# Altium PCB ESC.PcbDoc
Units mil, origin at the board's own origin, x right, y up, seen from the top; angles counter-clockwise.
Board outline 1750 x 2730 mil, 2 copper layers (Top Layer, Bottom Layer); 82 components, 60 nets, 320 pads, 163 vias.
Unrouted connection lines stored in the file: 1.
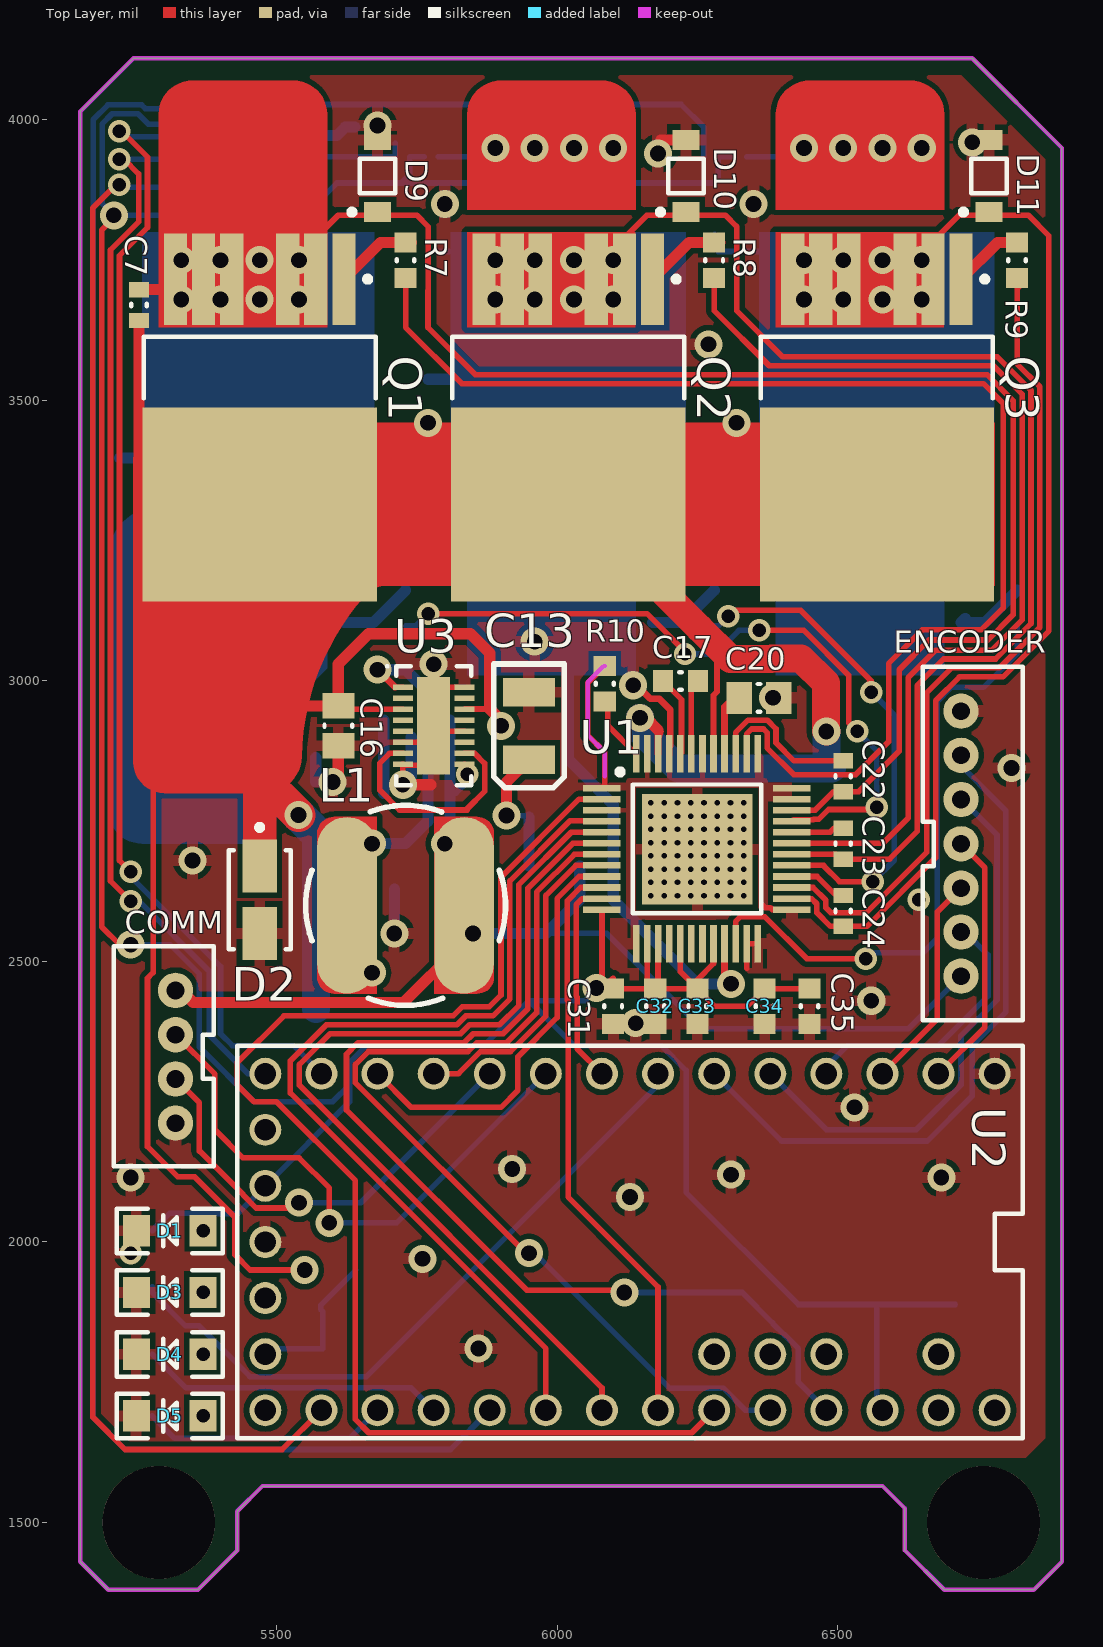
[diagram p0: Top Layer view]
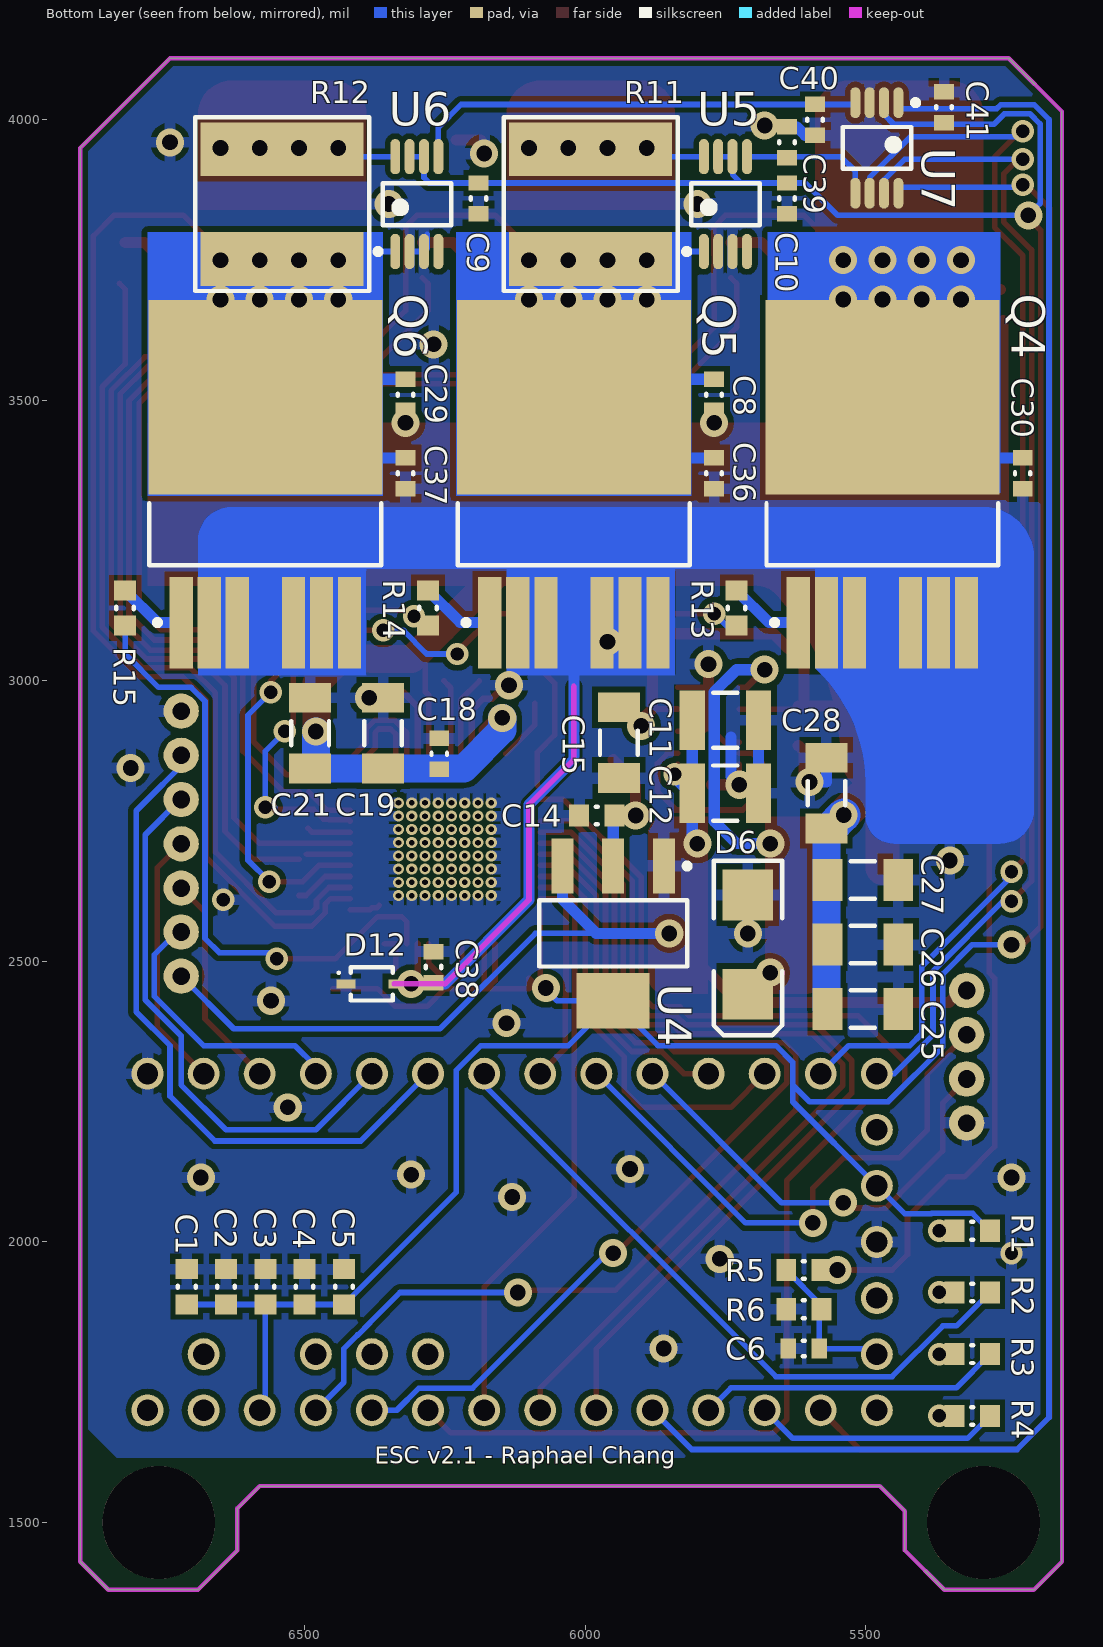
[diagram p1: Bottom Layer view, seen from below]

## Layer stack, top to bottom
Top Solder: solder mask 0.4, Solder Resist, Dk 3.5
Top Layer: signal copper 1.4
Dielectric 1: dielectric 12.6, FR-4, Dk 4.8
Bottom Layer: signal copper 1.4
Bottom Solder: solder mask 0.4, Solder Resist, Dk 3.5

## Board outline
5150,1430 5200,1380 5360,1380 5430,1450 5430,1520 5475,1565 6580,1565 6620,1525 6620,1450 6690,1380 6850,1380 6900,1430 6900,3950 6740,4110 5245,4110 5150,4015

## Design rules (kind name [scope] priority, off if disabled: settings)
Clearance Clearance_1 [InPolygon] p1: gap=9.84
Clearance [All] p2: gap=5.91
PolygonConnect [All] p1: connectstyle=Relief reliefconductorwidth=20 reliefentries=4 polygonreliefangle="90 Angle" airgapwidth=10
RoutingVias [All] p1: holewidth=28 width=50 viastyle="Through Hole" minholewidth=24 minwidth=40 maxholewidth=28 maxwidth=50
SolderMaskExpansion [All] p1: expansion=4
Width [All] p1: maxlimit=60 minlimit=10 preferedwidth=10
30 further rules are at their usual default settings.

## Classes and differential pairs
component class U_Power: C7 C8 C11 C12 C13 C14 C15 C16 C17 C18 C19 C20 C21 C22 C23 C24 C25 C26 C27 C28 C29 C30 C31 C32 C33 C34 C35 C36 C37 C38 D2 D6 D9 D10 D11 D12 L1 Q1 Q2 Q3 Q4 Q5 Q6 R7 R8 R9 R10 R11 R12 R13 R14 R15 U1 U3 U4
component class U_MCU: C1 C2 C3 C4 C5 C6 C9 C10 C39 C40 C41 D1 D3 D4 D5 R1 R2 R3 R4 R5 R6 U5 U6 U7
component class ESC: COMM ENCODER

## Components (designator, comment, footprint, x,y, rotation, side; value= is the part's Value field where it differs from the comment)
C1 "2.2uF" CAPC0603(1608)55_N 6710,1920 r270 bottom
C2 "2.2uF" CAPC0603(1608)55_N 6640,1920 r270 bottom
C3 "2.2uF" CAPC0603(1608)55_N 6570,1920 r270 bottom
C4 "2.2uF" CAPC0603(1608)55_N 6500,1920 r270 bottom
C5 "2.2uF" CAPC0603(1608)55_N 6430,1920 r270 bottom
C6 "0.1uF" CAPC0603(1608)100_L 5610,1810 r0 bottom
C7 "100nF" CAPC0603(1608)100_L 5255,3670 r270 top
C8 "100nF" CAPC0603(1608)100_L 5770,3510 r270 bottom
C9 "0.1uF" CAPC0603(1608)100_L 6190,3860 r90 bottom
C10 "0.1uF" CAPC0603(1608)100_L 5640,3860 r90 bottom
C11 "100uF" CAPC1210(3225)280_N 5750,2930 r0 bottom
C12 "100uF" CAPC1210(3225)280_N 5750,2800 r0 bottom
C13 "100uF" AVX-CAPC7343_V 5950,2920 r90 top
C14 "2.2uF" CAPC0603(1608)55_N 5979.21,2760 r0 bottom
C15 "10uF" CAPC1206(3216)190_M 5940,2890 r90 bottom
C16 "4.7uF" CAPC0805(2012)145_N 5610,2920 r270 top
C17 "470nF" CAPC0603(1608)100_N 6220,3000 r0 top
C18 "0.1uF" CAPC0603(1608)100_L 6260,2870 r270 bottom
C19 "10uF" CAPC1206(3216)190_M 6360,2907.01 r270 bottom
C20 "10uF" CAPC0805(2012)145_N 6360,2970 r0 top
C21 "10uF" CAPC1206(3216)190_M 6490,2907.01 r270 bottom
C22 "470nF" CAPC0603(1608)100_L 6510,2830 r270 top
C23 "470nF" CAPC0603(1608)100_L 6510,2710 r270 top
C24 "470nF" CAPC0603(1608)100_L 6510,2590 r270 top
C25 "10uF" CAPC1206(3216)190_M 5505,2415 r0 bottom
C26 "10uF" CAPC1206(3216)190_M 5505,2530 r0 bottom
C27 "10uF" CAPC1206(3216)190_M 5505,2645 r0 bottom
C28 "10uF" CAPC1206(3216)190_M 5570,2800 r270 bottom
C29 "100nF" CAPC0603(1608)100_L 6320,3510 r270 bottom
C30 "100nF" CAPC0603(1608)100_L 5220,3370 r90 bottom
C31 "2.2uF" CAPC0603(1608)55_N 6100,2420 r90 top
C32 "2.2uF" CAPC0603(1608)55_N 6175,2420 r90 top
C33 "2.2uF" CAPC0603(1608)55_N 6250,2420 r90 top
C34 "2.2uF" CAPC0603(1608)55_N 6370,2420 r90 top
C35 "2.2uF" CAPC0603(1608)55_N 6450,2420 r90 top
C36 "100nF" CAPC0603(1608)100_L 5770,3370 r90 bottom
C37 "100nF" CAPC0603(1608)100_L 6320,3370 r90 bottom
C38 "0.1uF" CAPC0603(1608)100_L 6270,2490 r90 bottom
C39 "0.1uF" CAPC0603(1608)100_L 5640,3960 r270 bottom
C40 "0.1uF" CAPC0603(1608)100_L 5590,4000 r90 bottom
C41 "2.2uF" CAPC0603(1608)100_L 5360,4022.87 r270 bottom
COMM "" JST-4-PTH-VERT 5320,2330 r90 top (schematic designator JP1)
D1 "LED-BLUE" LED-1206 5310,2020 r180 top
D2 "TVS 50V" VISH-DO-214AC-2_N 5470,2610 r270 top
D3 "LED-GREEN" LED-1206 5310,1910 r180 top
D4 "LED-RED" LED-1206 5310,1800 r180 top
D5 "LED-AMBER" LED-1206 5310,1690 r180 top
D6 "" SMB 5710,2530 r270 bottom
D9 "MMSZ5262BT1G" ONSC-SOD-123-2-425-04_V 5680,3900 r90 top
D10 "MMSZ5262BT1G" ONSC-SOD-123-2-425-04_V 6230,3900 r90 top
D11 "MMSZ5262BT1G" ONSC-SOD-123-2-425-04_V 6770,3900 r90 top
D12 "CDSOD323" SOD323 6380,2460 r180 bottom
ENCODER "Encoder Pins" JST-7-PTH-VERT 6720,2710 r270 top (schematic designator JP2)
L1 "SDR0805-180ML" SDR0805-180ML 5730,2600 r0 top
Q1 "IRFS7530" DPAK127P1525X483-7N 5470,3470 r270 top
Q2 "IRFS7530" DPAK127P1525X483-7N 6020,3470 r270 top
Q3 "IRFS7530" DPAK127P1525X483-7N 6570,3470 r270 top
Q4 "IRFS7530" DPAK127P1525X483-7N 5470,3350 r90 bottom
Q5 "IRFS7530" DPAK127P1525X483-7N 6020,3350 r90 bottom
Q6 "IRFS7530" DPAK127P1525X483-7N 6570,3350 r90 bottom
R1 "10R" RESC0603(1608)_N 5310,2020 r180 bottom
R2 "15R" RESC0603(1608)_N 5310,1910 r180 bottom
R3 "180R" RESC0603(1608)_N 5310,1800 r180 bottom
R4 "150R" RESC0603(1608)_N 5310,1690 r180 bottom
R5 "200K" RESC0603(1608)_N 5610,1950 r180 bottom
R6 "10K" RESC0603(1608)_N 5610,1880 r0 bottom
R7 "4R7" RESC0603(1608)_N 5730,3750 r270 top
R8 "4R7" RESC0603(1608)_N 6280,3750 r270 top
R9 "4R7" RESC0603(1608)_N 6820,3750 r270 top
R10 "3K3" RESC0603(1608)_N 6085,2995 r270 top
R11 "" Shunt 5990,3850 r270 bottom
R12 "" Shunt 6540,3850 r270 bottom
R13 "4R7" RESC0603(1608)_N 5730,3130 r270 bottom
R14 "4R7" RESC0603(1608)_N 6280,3130 r270 bottom
R15 "4R7" RESC0603(1608)_N 6820,3130 r270 bottom
U1 "A4935" LQFP-48 6250,2700 r0 top
U2 "Teensy 3.2" TEENSY_3.0+4 6130,2000 r270 top
U3 "LTC3637" SON50P300X85_HS-17N 5780,2920 r0 top
U4 "TC2117" SOT-223-DB3_M 5950,2550 r270 bottom
U5 "AD8418" MSOP-8 5750,3850 r90 bottom
U6 "AD8418" MSOP-8 6300,3850 r90 bottom
U7 "ADC122S101CIMM/NOPB" MUA08A_L 5480,3950 r270 bottom

## Footprints (in the part's own frame and the unit in brackets; to place one, negate y for a bottom-side part, rotate by r counter-clockwise, add the part's x,y. Pads: shape width x height; smd on the part's side, far side on the other; paste and mask are expansions set on the pad)
AVX-CAPC7343_V [mm] "SMT Capacitor, 2 Leads, Body 7.3x4.3mm"
  rect 1.3x2.35 smd: 1(-1.535,0.001) 2(1.515,0.001)
  silkscreen extent -2.8,-1.6 2.8,1.6, body extent -2.1,-1.1 2.1,1.1, height 1.9
CAPC0603(1608)55_N [mm] "Chip Capacitor, Body 1.6x0.8mm, Height 0.55mm, IPC Medium Density"
  rect 0.9x1 smd: 1(-0.8,0) 2(0.8,0)
  silkscreen extent -0.05,-0.4 0.05,0.4, body extent -0.87,-0.48 0.88,0.47, height 0.55
CAPC0603(1608)100_L [mm] "Chip Capacitor, Body 1.6x0.8mm, Height 1.0mm, IPC High Density"
  rect 0.7x0.9 smd: 1(-0.7,0) 2(0.7,0)
  silkscreen extent -0.05,-0.35 0.05,0.35, body extent -0.87,-0.47 0.88,0.48, height 1
CAPC0603(1608)100_N [mm] "Chip Capacitor, Body 1.6x0.8mm, Height 1.0mm, IPC Medium Density"
  rect 0.9x1 smd: 1(-0.8,0) 2(0.8,0)
  silkscreen extent -0.05,-0.4 0.05,0.4, body extent -0.87,-0.48 0.88,0.47, height 1
CAPC0805(2012)145_N [mm] "Chip Capacitor, Body 2.0x1.2mm, Height 1.45mm, IPC Medium Density"
  rect 1.15x1.45 smd: 1(-0.9,0) 2(0.9,0)
  silkscreen extent -0.05,-0.62 0.05,0.63, body extent -1.1,-0.72 1.1,0.73, height 1.45
CAPC1206(3216)190_M [mm] "Chip Capacitor, Body 3.2x1.6mm, Height 1.9mm, IPC Low Density"
  rect 1.35x1.9 smd: 1(-1.6,0) 2(1.6,0)
  silkscreen extent -0.55,-0.85 0.55,0.85, body extent -1.7,-0.9 1.7,0.9, height 1.9
CAPC1210(3225)280_N [mm] "Chip Capacitor, Body 3.2x2.5mm, Height 2.8mm, IPC Medium Density"
  rect 1.15x2.7 smd: 1(-1.5,0) 2(1.5,0)
  silkscreen extent -0.55,-1.25 0.55,1.25, body extent -1.7,-1.4 1.7,1.4, height 2.8
DPAK127P1525X483-7N [mm] "D2-PAK, 7-Pads, Body 7.93x8.63mm (max), IPC Medium Density"
  rect 4.15x1.05 smd mask+0.051: 1(-6.25,3.81) 2(-6.25,2.54) 2(-6.25,-1.27) 2(-6.25,1.27) 2(-6.25,-3.81) 2(-6.25,-2.54)
  rect 8.8x10.6 smd: 8(3.95,0)
  silkscreen extent -6.37,-5.25 -0.85,5.25, body extent -7,-5 8,5, height 4.2
JST-4-PTH-VERT [mil]
  round 63 hole 31.5: 1(-118.11,0) 2(-39.37,0) 3(39.37,0) 4(118.37,0)
  silkscreen extent -195,-68 197,110, body extent -195,-67 195,110, height 236
JST-7-PTH-VERT [mil]
  round 63 hole 31.5: 1(-236.22,0) 2(-157.48,0) 3(-78.74,0) 4(0.26,0) 5(79.26,0) 6(157.48,0) 7(236.22,0)
  silkscreen extent -315,-68 315,110, body extent -317,-67 309,110, height 236
LED-1206 [mil]
  rect 48x56 smd: A(-59.06,0) C(60,0)
  silkscreen extent -94,-39 95,40, body extent -63,-31 63,31, height 43
LQFP-48 [mm]
  rect 1.7x0.3 smd mask+0.076: 1(-4.318,2.767) 2(-4.318,2.267) 3(-4.318,1.767) 4(-4.318,1.267) 5(-4.318,0.767) 6(-4.318,0.267) 7(-4.318,-0.233) 8(-4.318,-0.733) 9(-4.318,-1.233) 10(-4.318,-1.733) 11(-4.318,-2.233) 12(-4.318,-2.733) 25(4.282,-2.733) 26(4.282,-2.233) 27(4.282,-1.733) 28(4.282,-1.233) 29(4.282,-0.733) 30(4.282,-0.233) 31(4.282,0.267) 32(4.282,0.767) 33(4.282,1.267) 34(4.282,1.767) 35(4.282,2.267) 36(4.282,2.767)
  rect 0.3x1.7 smd mask+0.076: 13(-2.768,-4.283) 14(-2.268,-4.283) 15(-1.768,-4.283) 16(-1.268,-4.283) 17(-0.768,-4.283) 18(-0.268,-4.283) 19(0.232,-4.283) 20(0.732,-4.283) 21(1.232,-4.283) 22(1.732,-4.283) 23(2.232,-4.283) 24(2.732,-4.283) 37(2.732,4.317) 38(2.232,4.317) 39(1.732,4.317) 40(1.232,4.317) 41(0.732,4.317) 42(0.232,4.317) 43(-0.268,4.317) 44(-0.768,4.317) 45(-1.268,4.317) 46(-1.768,4.317) 47(-2.268,4.317) 48(-2.768,4.317)
  rect 5x5 smd: 49(0,0)
  silkscreen extent -3.63,-2.9 2.9,3.63, body extent -4.5,-4.5 4.5,4.5, height 1.5
MSOP-8 [mm] "SOP, 8-Leads, Body 3x3mm, Pitch 0.65mm, IPC Medium Density"
  oval 1.6x0.45 smd: 1(-2.15,0.975) 2(-2.15,0.325) 3(-2.15,-0.325) 4(-2.15,-0.975) 5(2.15,-0.975) 6(2.15,-0.325) 7(2.15,0.325) 8(2.15,0.975)
  silkscreen extent -2.27,-1.55 0.95,1.88, body extent -1.55,-1.55 1.55,1.55, height 0.05
MUA08A_L [mm] "TSOP, 8-Leads, Body 3x3mm, Pitch 0.65mm, IPC High Density"
  oval 1.4x0.45 smd: 1(-2.05,0.975) 2(-2.05,0.325) 3(-2.05,-0.325) 4(-2.05,-0.975) 5(2.05,-0.975) 6(2.05,-0.325) 7(2.05,0.325) 8(2.05,0.975)
  silkscreen extent -2.17,-1.55 0.95,1.87, body extent -1.55,-1.55 1.55,1.55, height 1.09
ONSC-SOD-123-2-425-04_V [mm] "SOD, 2-Leads, Body 2.69x1.6mm"
  rect 0.91x1.22 smd: 1(-1.635,0) 2(1.635,0)
  silkscreen extent -1.76,-0.8 0.78,1.28, body extent -1.35,-0.8 1.35,0.8, height 1.35
RESC0603(1608)_N [mm] "Chip Resistor, Body 1.6x0.8mm, IPC Medium Density"
  rect 0.9x1 smd: 1(-0.8,0) 2(0.8,0)
  silkscreen extent -0.05,-0.4 0.05,0.4, body extent -0.85,-0.47 0.85,0.47, height 0.6
SDR0805-180ML [mm]
  rrect100% 2.7x8 smd: 1(-2.65,0) 2(2.65,0)
  Top Layer region: 3.25,4 1.3,4 1.3,-4 3.25,-4 3.537,-3.943 3.78,-3.78 3.943,-3.537 4,-3.25 4,-3.25 4,3.25 3.943,3.537 3.78,3.78 3.537,3.943 3.25,4
  Top Layer region: -3.25,4 -1.3,4 -1.3,-4 -3.25,-4 -3.537,-3.943 -3.78,-3.78 -3.943,-3.537 -4,-3.25 -4,-3.25 -4,3.25 -3.943,3.537 -3.78,3.78 -3.537,3.943 -3.25,4
  silkscreen extent -4.52,-4.53 4.52,4.52, body extent -3.9,-3.9 3.9,3.9, height 5.3
Shunt [mm]
  rect 2.44x7.38 smd: 1(-2.48,0) 2(2.48,0)
  silkscreen extent -3.94,-3.94 3.94,3.94
SMB [mm] "DO-214-AA/SMB; 2 C-Bend Leads; Body 5.3 x 3.6 mm, inc. leads (LxW)"
  rect 2.3x2.3 smd: 1(-2.25,0) 2(2.25,0)
  silkscreen extent -3.8,-1.55 4.1,1.55
SOD323 [mm] "SODFL, 2-Leads, Body 1.30x2.57mm, IPC Medium Density"
  rect 0.85x0.4 smd: 1(-1.175,0) 2(1.175,0)
  silkscreen extent -1.55,-0.75 0.95,0.75, body extent -0.95,-0.72 0.95,0.72, height 1.14
SON50P300X85_HS-17N [mm] "SON, 16-Leads, Body 5.00x3.00mm, Pitch 0.50mm, Thermal Pad 4.40x1.49mm, IPC Medium Density"
  rect 0.9x0.25 smd mask+0.076: 1(-1.395,1.75) 2(-1.395,1.25) 3(-1.395,0.75) 4(-1.395,0.25) 5(-1.395,-0.25) 6(-1.395,-0.75) 7(-1.395,-1.25) 8(-1.395,-1.75) 9(1.395,-1.75) 10(1.395,-1.25) 11(1.395,-0.75) 12(1.395,-0.25) 13(1.395,0.25) 14(1.395,0.75) 15(1.395,1.25) 16(1.395,1.75)
  rect 1.49x4.4 smd mask+0.076: 17(0,0)
  silkscreen extent -2.15,-2.7 1.7,2.75, body extent -1.56,-2.05 1.56,2.05, height 0.8
SOT-223-DB3_M [mm] "SOT223, 4-Leads, Body 6.5x3.5mm, Pitch 2.3mm, Lead Span 7mm, IPC Low Density"
  rect 2.5x1 smd: 1(-3.05,2.3) 2(-3.05,0) 3(-3.05,-2.3)
  rect 2.5x3.3 smd: 2(3.05,0)
  silkscreen extent -3.17,-3.35 1.5,3.47, body extent -1.85,-3.35 1.85,3.35, height 1.8
TEENSY_3.0+4 [mil]
  round 57 hole 38: 0(-300,550) 1(-300,450) 2(-300,350) 3(-300,250) 3.3V(300,450) 3.3V1(-100,-650) 4(-300,150) 5(-300,50) 6(-300,-50) 7(-300,-150) 8(-300,-250) 9(-300,-350) 10(-300,-450) 11(-300,-550) 12(-300,-650) 13(300,-650) 14/A0(300,-550) 15/A1(300,-450) 16/A2(300,-350) 17/A3(300,-250) 18/A4(300,-150) 19/A5(300,-50) 20/A6(300,50) 21/A7(300,150) 22/A8(300,250) 23/A9(300,350) A10(200,250) A11(200,150) A14(200,-650) AGND(300,550) AREF(200,350) GND(-300,650) GND1(0,-650) PGM(100,-650) VBAT(-200,-650) VIN(300,650) VUSB(200,550)
  silkscreen extent -350,-700 350,700, body extent -348,-708 349,720, height 505
VISH-DO-214AC-2_N [mm] "DO-214AC, 2-Leads, Body 4.5x2.79mm, IPC Medium Density"
  rect 2.4x1.55 smd: 1(-1.525,0) 2(1.525,0)
  silkscreen extent -3.4,-1.4 2.25,1.4, body extent -2.25,-1.4 2.25,1.39, height 2.29

## Part data
C1 C2 C3 C4 C5 C14 C31 C32 C33 C34 C35: library part CMP-1035-02762-1, "CAP 2.2uF 16V ±10% 0603 (1608 Metric) Thickness 0.55mm SMD"
C6 C7 C8 C18 C29 C30 C36 C37: library part CMP-1035-02591-1, "CAP 100nF 50V ±5% 0603 (1608 Metric) Thickness 1mm SMD"
C9 C10: library part CMP-1035-02577-1, "CAP 100nF 6.3V ±20% 0603 (1608 Metric) Thickness 1mm SMD"
C11 C12: library part CMP-1038-02301-1, "CAP 100uF 10V ±10% 1210 (3225 Metric) Thickness 2.8mm SMD"
C13: library part AVX-CAP-P-2
C15 C19 C21 C25 C26 C27 C28: library part CMP-1037-04982-1, "CAP 10uF 50V ±10% 1206 (3216 Metric) Thickness 1.9mm SMD"
C16: library part CMP-1036-04900-1, "CAP 4.7uF 50V ±10% 0805 (2012 Metric) Thickness 1.45mm SMD"
C17: library part CMP-1035-02704-1, "CAP 470nF 25V ±20% 0603 (1608 Metric) Thickness 1mm SMD"
C20: library part CMP-1036-04932-1, "CAP 10uF 25V ±10% 0805 (2012 Metric) Thickness 1.45mm SMD"
C22 C23 C24: library part CMP-1035-02703-1, "CAP 470nF 25V ±10% 0603 (1608 Metric) Thickness 1mm SMD"
C38 C39 C40: library part CMP-1035-02575-1, "CAP 100nF 6.3V ±5% 0603 (1608 Metric) Thickness 1mm SMD"
C41: library part CMP-1035-02754-1, "CAP 2.2uF 6.3V ±10% 0603 (1608 Metric) Thickness 1mm SMD"
COMM: library part JST_4_VERT
D1: library part LED-BLUE1206
D2: library part CMP-0548-00253-1, "Transient Voltage Suppressor, 6.40 to 231 V, 45 V Stand-off Voltage, Uni-Directional, -55 to 155 degC, 2-pin DO-214AC, Pb-Free, Tape and Reel"
D3: library part LED-GREEN1206
D4: library part LED-RED1206
D5: library part LED-AMBER1206
D6: library part "D Schottky", "Schottky Diode"
D9 D10 D11: library part CMP-1060-00504-1, "Zener Voltage Regulator, 500 mW, 2-Pin SOD-123, Pb-Free, Tape and Reel"
D12: "Zener Voltage Regulator, 500 mW, 2-Pin SOD-123, Pb-Free, Tape and Reel"
ENCODER: library part JST_7_VERT
L1: "Inductor"
Q1 Q2 Q3 Q4 Q5 Q6: "N-Channel MOSFET"
R1: library part CMP-1012-00026-1, "10R 0.1W 5% 0603 (1608 Metric)  SMD"
R2: library part CMP-1012-00030-1, "15R 0.1W 5% 0603 (1608 Metric)  SMD"
R3: library part CMP-1012-00056-1, "180R 0.1W 5% 0603 (1608 Metric)  SMD"
R4: library part CMP-1012-00054-1, "150R 0.1W 5% 0603 (1608 Metric)  SMD"
R5: library part CMP-1012-00129-1, "200K 0.1W 5% 0603 (1608 Metric)  SMD"
R6: library part CMP-1012-00098-1, "10K 0.1W 5% 0603 (1608 Metric)  SMD"
R7 R8 R9 R13 R14 R15: library part CMP-1012-00018-1, "4R7 0.1W 5% 0603 (1608 Metric)  SMD"
R10: library part CMP-1012-00086-1, "3K3 0.1W 5% 0603 (1608 Metric)  SMD"
R11: library part Shunt, "0.001R"
R12: library part Shunt, "Resistor"
U2: library part TEENSY_3.0+4
U4: library part PM-LINEREG-TC2117-IL4
U7: library part CMP-0054-00398-2, "2 Channel, 500 kSPS to 1 MSPS 12-Bit A/D Converter, 8-pin Mini SOIC, Pb-Free"

## Free pads (board coordinates)
  round 201 hole 201: 0(5290,1500) 1(6760,1500)

## Via types
v1: diameter 50, hole 28, Top Layer to Bottom Layer, 78 vias
v2: diameter 20, hole 10, Top Layer to Bottom Layer, 64 vias
v3: diameter 40, hole 24, Top Layer to Bottom Layer, 21 vias

## Nets (pads, with @x,y where several pads share a name; then routed paths per layer and width w, separated by ;. In a path a pad name is that pad's centre, name@x,y a point inside that pad or via, vN(x,y) a via of type N, cw(c..) or ccw(c..) an arc to the next point about the centre after c; other vN are vias at no path point)
5V: C11.2 C12.2 COMM.4 ENCODER.7 L1.2 U3.9 U4.3 | length 2059.2
  Top Layer w10: L1.2@5824.33,2524.33 L1.2@5824.33,2600 ; U3.9 5846.02,2840 v3(5840,2833.98)
  Top Layer w20: COMM.4@5320,2458.37 5351.56,2426.81 5507.1,2426.81 5507.3,2426.61 5726.61,2426.61 L1.2@5824.33,2524.33
  Bottom Layer w10: v1(5800,2710) v1@5809.06,2719.06 ; C12.2 5820,2800 5840,2820 v3(5840,2833.98) ; 5980,2550 6088.6,2550 6258.6,2380 6626.22,2380 ENCODER.7
  Bottom Layer w20: v1@5809.06,2719.06 C12.2 C11.2 ; v1(5850,2550) 5980,2550 6040.55,2610.55 U4.3
ADC_CS: U2.17/A3 U7.1 | length 3353.7
  Bottom Layer w10: U7.1@5440,4020 5266.2,4020 5259.39,4026.81 5199.32,4026.81 5173.19,4000.68 5173.19,1686.81 5230,1630 5810,1630 U2.17/A3
C1: C39.2 U5.5 U7.5 | length 266.9
  Bottom Layer w10: U7.5 5518.39,3908.39 5544.65,3934.65 U5.5 U5.5@5711.61,3958.39
C2: C40.2 U6.5 U7.4 | length 812.4
  Bottom Layer w10: U7.4@5518.39,4027.56 6221.04,4027.56 6261.61,3986.98 U6.5
CA: C22.1 U1.39 | length 283.8
  Top Layer w10: U1.39 6318.19,2908.19 6340.24,2930.24 6374.57,2930.24 6390.28,2914.53 6390.28,2889.72 6422.44,2857.56 C22.1
CB: C23.1 U1.32 | length 78.6
  Top Layer w10: U1.32 6486.73,2730.2 C23.1@6494.09,2737.56
CC: C24.1 U1.28 | length 105.4
  Top Layer w10: U1.28 6463.54,2651.46 6497.47,2617.53 C24.1@6509.97,2617.53
CLK: ENCODER.5 U2.1 | length 388.7
  Top Layer w10: U2.1 6677.59,2397.59 6677.59,2588.33 ENCODER.5
CS: ENCODER.6 U2.2 | length 491.4
  Bottom Layer w10: U2.2 6480,2312.52 6517.48,2350 6680,2350 6768.19,2438.19 6768.19,2511.81 6727.48,2552.52 ENCODER.6
DIO: ENCODER.4 U2.0 | length 461.4
  Top Layer w10: U2.0 6762.41,2382.41 6762.41,2667.33 ENCODER.4
GHA: R7.2 U1.38 | length 2329.2
  Top Layer w10: R7.2@5740,3718.5 5730,3708.5 5730,3630 5830,3530 6760,3530 6795,3495 6795,3130 6755.91,3090.91 6650.91,3090.91 6590.91,3030.91 6590.91,2891.55 6532.23,2832.87 6422.2,2832.87 6374.37,2880.71 6374.37,2907.94 6367.98,2914.33 6346.82,2914.33 6337.87,2905.38 U1.38
GHB: R8.2 U1.31 | length 1797.2
  Top Layer w10: R8.2@6290,3718.5 6280,3708.5 6280,3660 6378.19,3561.81 6778.19,3561.81 6828.88,3511.12 6828.88,3108.88 6775,3055 6675,3055 6625.91,3005.91 6625.91,2755.91 6580.51,2710.51 U1.31
GHC: R9.2 U1.27 | length 1479.4
  Top Layer w10: U1.27 6456.5,2631.77 6478.86,2609.41 6478.86,2596.03 6487.77,2587.13 6551.34,2587.13 6659.09,2694.88 6659.09,2979.09 6703.19,3023.19 6788.18,3023.19 6860.69,3095.71 6860.69,3524.31 6820,3565 6820,3698.5 R9.2@6830,3708.5
GLA: R13.2 U1.33 | length 1322.8
  Top Layer w10: v3(5770,3120) 6160,3120 6228.01,3051.99 v3(6228.01,3048.01) ; v3(6360,3090) 6440,3090 6520,3010 6520,2925 v3(6535,2910) ; U1.33 6421.46,2752.76 6456.56,2752.76 6457.47,2753.66 6466.67,2753.66 6483.91,2770.91 6565.91,2770.91 v3(6570,2775)
  Bottom Layer w10: R13.2 5748.5,3098.5 v3(5770,3120) ; v3(6228.01,3048.01) 6282.33,3048.01 6284.32,3050 6322.16,3087.84 6321.85,3088.15 6323.71,3090 v3(6360,3090) ; v3(6535,2910) 6570,2875 6570,2791.29 6553.71,2775 v3(6570,2775)
GLB: R14.2 U1.29 | length 898.8
  Top Layer w10: v3(6305,3115) 6315.91,3125.91 6434.09,3125.91 6560,3000 6550,2990 v3(6560,2980) ; U1.29 6475,2671.14 6475,2670.52 6503.28,2642.24 v3(6562.76,2642.24)
  Bottom Layer w10: R14.2 6288.5,3098.5 v3(6305,3115) ; v3(6560,2980) 6600.91,2939.09 6600.91,2680.39 v3(6562.76,2642.24)
GLC: R15.2 U1.22 | length 1104
  Top Layer w10: U1.22 6318.19,2571.06 6327.13,2580 6370,2580 6445,2505 v3(6550,2505) v3@6550,2499.99
  Bottom Layer w10: v3(6550,2505) 6560.51,2515.51 6651.92,2515.51 6677.59,2541.19 6677.59,2963.79 6702.44,2988.63 6760.12,2988.63 6820,3048.5 R15.2
GND: C1.1 C2.1 C3.1 C4.1 C5.1 C6.2 C9.1 C10.1 C11.1 C12.1 C13.2 C14.2 C15.1 C16.2 C18.1 C19.1 C20.2 C21.1 C25.1 C26.1 C27.1 C28.1 C30.1 C31.1 C32.1 C33.1 C34.1 C35.1 C36.1 C37.1 C38.1 C38.2 C39.1 C40.1 C41.1 COMM.1 D1.C D2.2 D3.C D4.C D5.C D6.1 D9.2 D10.2 D11.2 D12.1 D12.2 ENCODER.1 Q4.2 Q5.2 Q6.2 R6.2 R10.1 U1.1 U1.3 U1.13 U1.21 U1.23 U1.24 U1.25 U1.35 U1.36 U1.37 U1.42 U1.45 U1.47 U1.49 U2.GND U2.GND1 U3.6 U3.8 U3.12 U3.16 U3.17 U4.1 U5.2 U5.3 U6.2 U6.3 U7.3 | length 2446.5
  Top Layer w10: v1(5725.08,2814.92) U3.8 5726.18,2850 5750,2850 ; U3.6 5750.47,2890.47 U3.17 5789.84,2910.16 U3.12 ; U3.17@5780,2990 5781.1,2988.9 U3.16 ; U1.1 6085,2813.94 6085,2872.9 6054.41,2903.49 6054.41,2995.91 R10.1 ; v1(6135.59,2992.28) v1@6141.99,2992.28 ; v1@6298.5,2471.5 v1(6310,2460) ; 6337.87,2487.91 U1.23 U1.24 ; 6366.85,2599.88 6370.83,2595.91 6379.97,2595.91 6383.47,2592.4 U1.25
  Top Layer w12: v1@6141.99,2992.28 6165.86,2968.41 6181.59,2968.41 6201.91,2948.09 6201.91,2885.07 6200.08,2883.24 U1.45 ; v1@6298.5,2471.5 U1.21
  Top Layer w20: v1(5600,2820) 5610,2830 5610,2874.57 C16.2@5620,2884.57 ; v1(5725.08,2814.92) 5774.92,2814.92 ; U3.17 5780,2990 v1(5780,3030) ; 6185.63,3964.37 D10.2
  Bottom Layer w10: 6281.38,3796.18 6281.38,3771.18 U6.3 U6.2
  Bottom Layer w20: C28.1 5570,2820 v1(5600,2820) ; C40.1 5607.44,3972.44 5622.56,3987.56 C39.1 ; v1@5672.44,3997.56 v1(5680,3990) ; C12.1 C11.1 ; v1(5710,2550) D6.1@5710,2628.58 ; v1(5725.08,2814.92) 5730,2810 5730,2820 5740,2830 5740,2900 ; 6020,3120 6020,2860 6100,2780 6100,2610 6250,2460 v1(6310,2460)
  other v1: 5860,1810 5760,1970 6130,2080 5240,2115 6685,2115 6310,2120 5920,2130 6530,2240 6140,2390 6560,2430 5350,2680 6810,2845 6385,2970 5960,3070 6270,3600 5800,3850 6350,3850 6180,3940 6740,3960
  other v2: 6167.32,2617.32 6190.94,2617.32 6214.57,2617.32 6238.19,2617.32 6261.81,2617.32 6285.43,2617.32 6309.06,2617.32 6332.68,2617.32 6167.32,2640.94 6190.94,2640.94 6214.57,2640.94 6238.19,2640.94 6261.81,2640.94 6285.43,2640.94 6309.06,2640.94 6332.68,2640.94 6167.32,2664.57 6190.94,2664.57 6214.57,2664.57 6238.19,2664.57 6261.81,2664.57 6285.43,2664.57 6309.06,2664.57 6332.68,2664.57 6167.32,2688.19 6190.94,2688.19 6214.57,2688.19 6238.19,2688.19 6261.81,2688.19 6285.43,2688.19 6309.06,2688.19 6332.68,2688.19 6167.32,2711.81 6190.94,2711.81 6214.57,2711.81 6238.19,2711.81 6261.81,2711.81 6285.43,2711.81 6309.06,2711.81 6332.68,2711.81 6167.32,2735.43 6190.94,2735.43 6214.57,2735.43 6238.19,2735.43 6261.81,2735.43 6285.43,2735.43 6309.06,2735.43 6332.68,2735.43 6167.32,2759.06 6190.94,2759.06 6214.57,2759.06 6238.19,2759.06 6261.81,2759.06 6285.43,2759.06 6309.06,2759.06 6332.68,2759.06 6167.32,2782.68 6190.94,2782.68 6214.57,2782.68 6238.19,2782.68 6261.81,2782.68 6285.43,2782.68 6309.06,2782.68 6332.68,2782.68
  other v3: 5240,1980 6645,2610
NetC6_1: C6.1 R5.1 R6.1 U2.A14 | length 274.3
  Bottom Layer w10: U2.A14 5490,1810 C6.1 5582.44,1876.06 R6.1 5578.5,1887.01 R5.1
NetC17_1: C17.1 U1.44 | length 144.6
  Top Layer w10: C17.1 6221.69,2966.81 6221.69,2871.89 U1.44
NetC17_2: C17.2 U1.43 | length 135
  Top Layer w10: U1.43 6239.45,2987.95 C17.2
NetC20_1: C20.1 U1.40 | length 120.8
  Top Layer w12: U1.40 6298.5,2953.94 C20.1@6324.57,2980
NetD1_A: D1.A R1.1
  other v3: 5369.06,2020
NetD3_A: D3.A R2.1
  other v3: 5369.06,1910
NetD4_A: D4.A R3.1
  other v3: 5369.06,1800
NetD5_A: D5.A R4.1
  other v3: 5369.06,1690
NetD6_2: D6.2 L1.1 U3.1 | length 511.1
  Top Layer w10: U3.1@5711.1,2988.9 U3.1
  Top Layer w12: v1(5680,3020) U3.1@5711.1,2988.9
  Bottom Layer w20: v1(5670,2710) 5730,2710 5770,2750 5770,2980 5730,3020 v1(5680,3020)
  other v1: 5670,2480
NetQ1_2: Q1.1 R7.1 | length 147.1
  Top Layer w20: Q1.1 5685.43,3781.5 R7.1@5740,3781.5
NetQ2_2: Q2.1 R8.1 | length 147.1
  Top Layer w20: Q2.1 6235.43,3781.5 R8.1@6290,3781.5
NetQ3_2: Q3.1 R9.1 | length 127.1
  Top Layer w20: Q3.1 6785.43,3781.5 R9.1
NetQ4_2: Q4.1 R13.1 | length 133.8
  Bottom Layer w20: Q4.1 5672.44,3103.94 R13.1
NetQ5_2: Q5.1 R14.1 | length 133.8
  Bottom Layer w20: Q5.1 6222.44,3103.94 R14.1
NetQ6_2: Q6.1 R15.1 | length 134.5
  Bottom Layer w20: Q6.1@6727.56,3111.5 Q6.1 6762.44,3103.94 R15.1
NetR2_2: R2.2 U2.5 | length 1209.2
  Bottom Layer w10: R2.2@5278.5,1920.17 R2.2 5338.03,1850.47 5362.29,1850.47 5452.76,1760 5660,1760 6180,2280 U2.5
NetR3_2: R3.2 U2.16/A2 | length 542.9
  Bottom Layer w10: R3.2 5338.5,1740 5740,1740 U2.16/A2
NetR4_2: R4.2 U2.15/A1 | length 438.8
  Bottom Layer w10: R4.2 5318.5,1650 5630,1650 U2.15/A1
NetR10_2: R10.2 U1.48 | length 111.2
  Top Layer w10: R10.2@6090,2960 6090,2920.98 U1.48
NetR11_1: R11.1 U5.8 | length 108
  Bottom Layer w10: U5.8 5874.65,3934.65 v1(5890,3950)
  other v1: 5960,3950 6030,3950 6100,3950
NetR12_1: R12.1 U6.8 | length 108
  Bottom Layer w10: U6.8 6424.65,3934.65 v1(6440,3950)
  other v1: 6510,3950 6580,3950 6650,3950
NetU1_2: U1.2 U2.21/A7 | length 2380.2
  Top Layer w10: U1.2 6039.25,2789.25 5900,2650 5900,2440 5878.93,2418.93 5830.74,2418.93 5814.83,2403.03 5513.03,2403.03 5430,2320 5430,2280 5460,2250 5500,2250 5640.59,2109.41 5640.59,1683.68 5664.27,1660 6240,1660 U2.21/A7
NetU1_4: U1.4 U2.18/A4 | length 1669.6
  Top Layer w10: U2.18/A4 5980,1810 5524.69,2265.31 5524.69,2322.91 5588.9,2387.12 5821.42,2387.12 5837.32,2403.03 5885.52,2403.03 5915.91,2433.41 5915.91,2643.41 6023.4,2750.91 6077.13,2750.91 6076.1,2749.88 U1.4
NetU1_5: U1.5 U2.19/A5 | length 1676.6
  Top Layer w10: U2.19/A5 6080,1740 5540.59,2279.41 5540.59,2316.32 5595.49,2371.22 5828.01,2371.22 5843.91,2387.12 5897.15,2387.12 5931.81,2421.79 5931.81,2636.82 6025.18,2730.2 U1.5
NetU1_6: U1.6 U2.23/A9 | length 1949
  Top Layer w10: U1.6 6027.99,2710.51 5947.72,2630.24 5947.72,2415.2 5903.74,2371.22 5850.5,2371.22 5834.6,2355.31 5645.31,2355.31 5624.69,2334.69 5624.69,2235.31 5945.91,1914.09 6115.91,1914.09 v1(6120,1910)
  Bottom Layer w10: v1(6120,1910) 6330,1910 6384.09,1855.91 6384.09,1855.13 6405.13,1834.09 6405.91,1834.09 6430,1810 6430,1750 U2.23/A9
NetU1_7: U1.7 U2.22/A8 | length 1774.6
  Top Layer w10: v1(5950,1980) 5944.27,1980 5640.59,2283.68 5640.59,2316.32 5663.68,2339.41 5841.18,2339.41 5857.09,2355.31 5910.32,2355.31 5963.62,2408.61 5963.62,2623.65 6030.8,2690.83 U1.7
  Bottom Layer w10: v1(5950,1980) 5950,1968.19 5938.19,1980 5960,1980 6200.59,1739.41 6296.32,1739.41 6335.73,1700 U2.22/A8
NetU1_8: U1.8 U2.9 | length 579.7
  Top Layer w10: U2.9 5824.27,2300 5863.68,2339.41 5916.91,2339.41 5980,2402.49 5980,2617.53 6033.61,2671.14 U1.8
NetU1_9: U1.9 U2.10 | length 754.7
  Top Layer w10: U2.10 5740,2240 5900,2240 5930,2270 5930,2330 6000,2400 6000,2612.18 6039.27,2651.46 U1.9
NetU1_10: U1.10 U2.20/A6 | length 1046.6
  Top Layer w10: U1.10 6042.08,2631.77 6018.19,2607.88 6018.19,2431.04 6019.72,2429.5 6019.72,2080.28 6180,1920 U2.20/A6
NetU1_11: U1.11 U2.6 | length 370.7
  Top Layer w10: U2.6 6035.63,2344.37 6035.63,2436.09 6034.09,2437.63 6034.09,2601.29 6044.89,2612.09 U1.11
NetU3_7: U3.7 U3.10 | length 406.3
  Top Layer w10: U3.7 5701.3,2870.79 5684.09,2853.58 5684.09,2805.13 5719.22,2770 5840,2770 5840,2772.17 5870.91,2803.07 5870.91,2853.18 5853.3,2870.79 U3.10
QUAD_A: ENCODER.3 U2.3 | length 978.9
  Bottom Layer w10: U2.3 6480,2200 6640,2200 6720,2280 6720,2367.51 6784.09,2431.6 6784.09,2725.91 6720,2790 ENCODER.3
QUAD_B: ENCODER.2 U2.4 | length 1231.3
  Bottom Layer w10: U2.4 6400,2180 6660,2180 6740,2260 6740,2350 6800,2410 6800,2768.71 6703.71,2865 6720,2865 ENCODER.2
SA: C7.1 C22.2 C30.2 D9.1 Q1.2 Q4.8 U1.34 | length 2969.7
  Top Layer w10: Q1.2@5520,3716.06 5520,3740 5610,3830 5750,3830 5770.59,3809.41 5770.59,3759.26 5770,3758.67 5770,3741.33 5770.59,3740.74 5770.59,3696.27 5770,3695.68 5770,3630 5854.09,3545.91 6766.59,3545.91 6812.98,3499.52 6812.98,3117.98 6767.93,3072.93 6662.93,3072.93 6610,3020 6610,2875 6537.44,2802.44 C22.2 ; U1.34 6460.08,2769.57 C22.2@6492.95,2802.44
  Top Layer w20: C7.1@5260,3697.56 5301.5,3697.56 Q1.2@5320,3716.06
  Bottom Layer w10: v1(5540,3750) v1@5555.35,3765.35
  Bottom Layer w20: C30.2 5362.05,3397.56 Q4.8
  other v1: 5330,3680 5400,3680 5470,3680 5540,3680 5330,3750 5400,3750 5470,3750
SB: C8.1 C23.2 C36.2 D10.1 Q2.2 Q5.8 R11.2 U1.30 U5.1 | length 2873.7
  Top Layer w10: Q2.2@6070,3716.06 6095,3741.06 6095,3765 6160,3830 6300,3830 6320,3810 6320,3660 6402.28,3577.72 6784.78,3577.72 6844.79,3517.71 6844.79,3102.29 6781.59,3039.09 6689.09,3039.09 6641.81,2991.81 6641.81,2731.81 6592.44,2682.44 C23.2 ; U1.30 C23.2@6496.68,2690.83
  Bottom Layer w10: U5.1 5874.65,3765.35 v1(5890,3750)
  Bottom Layer w20: C36.2 5912.05,3397.56 Q5.8 5987.95,3537.56 C8.1
  other v1: 5890,3680 5960,3680 6030,3680 6100,3680 5960,3750 6030,3750 6100,3750
SC: C24.2 C29.1 C37.2 D11.1 Q3.2 Q6.8 R12.2 U1.26 U6.1 | length 2505.1
  Top Layer w10: U1.26 6453.69,2612.09 6462.95,2602.82 6462.95,2587.05 6487.56,2562.44 C24.2 6552.44,2562.44 6675,2685 6675,2965 6717.28,3007.28 6794.76,3007.28 6876.6,3089.12 6876.6,3793.4 6840,3830 6716.15,3830 Q3.2@6653.08,3766.92
  Bottom Layer w10: U6.1 6424.65,3765.35 v1(6440,3750)
  Bottom Layer w20: C37.2 6462.05,3397.56 Q6.8 6537.95,3537.56 C29.1
  other v1: 6440,3680 6510,3680 6580,3680 6650,3680 6510,3750 6580,3750 6650,3750
SCLK: U2.14/A0 U7.8 | length 2924.9
  Top Layer w10: v3(5220,3884.09) 5213.32,3884.09 5172.28,3843.06 5172.28,1687.72 5230,1630 5510,1630 U2.14/A0
  Bottom Layer w10: v3@5220.3,3880 5224.39,3884.09 v3(5220,3884.09) 5229.6,3884.09 5233.7,3880 5441.61,3880 U7.8
SDI: U2.11 U7.6 | length 2287.8
  Top Layer w10: v3(5220,3980) 5223.71,3980 5270,3933.71 5270,3808.19 5220,3758.19 5220,2680 v3(5240,2660)
  Bottom Layer w10: v3(5220,3980) 5230,3970 5420,3970 5492.8,3897.2 U7.6 ; v3@5251.59,2648.41 v3(5240,2660) 5240,2651.21 5400,2491.21 5400,2371.22 5421.22,2350 5530,2350 U2.11
SDO: U2.12 U7.7 | length 2096.9
  Top Layer w10: v3(5220,3930) 5227.8,3930 5254.09,3903.71 5254.09,3818.19 5204.09,3768.19 5204.09,2643.41 v3(5240,2607.5)
  Bottom Layer w10: v3(5220,3930) 5430,3930 5467.2,3892.8 U7.7 ; v3(5240,2607.5) 5254.99,2607.5 5380,2482.49 5380,2368.73 5448.73,2300 U2.12
SER_RX: COMM.3 U2.7 | length 1013.4
  Top Layer w10: COMM.3@5320,2379.37 COMM.3 5390,2299.37 5390,2200 5440,2150 5540,2150 5594.09,2095.91 v1(5594.09,2034.09)
  Bottom Layer w10: v1(5594.09,2034.09) 5714.09,2034.09 U2.7
SER_TX: COMM.2 U2.8 | length 820.6
  Top Layer w10: COMM.2@5320,2300.63 COMM.2 5362.41,2248.22 5362.41,2161.87 5362.46,2161.81 5363.18,2161.81 5440.59,2084.39 5440.59,2083.68 5463.68,2060.59 5539.41,2060.59 5540,2061.19 v1(5540,2070)
  Bottom Layer w10: v1(5540,2070) 5650,2070 U2.8
VCC: C1.2 C2.2 C3.2 C4.2 C5.2 C9.2 C10.2 C13.1 C14.1 C31.2 C32.2 C33.2 C34.2 C35.2 C41.2 R1.2 U1.12 U1.14 U1.15 U1.17 U1.20 U2.3.3V U2.3.3V1 U4.2 U5.6 U5.7 U6.6 U6.7 U7.2 | length 7170.5
  Top Layer w10: v1(5210,3830) 5214.86,3830 5188.19,3803.33 5188.19,2561.81 5220,2530 v1(5240,2530) ; v1(6070,2452.5) 6080,2462.5 U1.12 ; C31.2@6090.75,2460.75 6100,2470 C31.2 C32.2 ; U1.14 6160.71,2465.79 C32.2 ; U1.15 6180,2530.98 6180,2456.5 C32.2 ; U1.17 6219.76,2481.73 C33.2 ; U1.20 6278.82,2496.27 6250,2467.45 C33.2 ; C35.2 C34.2 6338.5,2420 6281.5,2420 C33.2 ; C32.2 C33.2
  Top Layer w20: v1(5910,2760) 5910,2819.61 C13.1
  Bottom Layer w10: v1(5240,2530) 5310,2530 5362.41,2477.59 5362.41,2347.59 5460,2250 5600,2250 5630,2280 ; R1.2 5309.41,2050.91 5381.86,2050.91 5382.76,2050 5430,2050 U2.3.3V1 5630,2250 5630,2280 ; U7.2@5467.2,4050 U7.2 5467.2,4027.61 5468.23,4026.59 5468.23,4013.41 5467.2,4012.39 5467.2,4009.65 5449.8,3992.24 5271.46,3992.24 5252.8,4010.91 5207.2,4010.91 5189.09,3992.8 5189.09,3850.91 v1(5210,3830) 5550,3830 5607.56,3887.56 C10.2 5721.97,3887.56 ; U5.7 U5.6 5737.2,3902.8 5721.97,3887.56 ; v1(5910,2760) C14.1 C14.1@5950,2757.72 ; v1(6070,2452.5) 6070,2450 6049.92,2429.92 U4.2@5950,2429.92 ; U6.7 U6.6 6287.2,3897.2 6277.56,3887.56 C9.2 5721.97,3887.56 ; U2.3.3V 6570,1710 C3.2 ; C1.2 C2.2 C3.2 ; 5630,2280 5630,2320 5660,2350 5870.08,2350 U4.2@5950,2429.92 ; U4.2@5950,2429.92 6029.92,2350 6185.73,2350 6230,2305.73 6230,2088.5 C5.2 C4.2 C3.2
  Bottom Layer w20: U4.2@5950,2670.08 C14.1@5950,2757.72
VDD: C7.2 C8.2 C15.2 C16.1 C18.2 C19.2 C21.2 C25.2 C26.2 C27.2 C28.2 C29.2 D2.1 Q1.8 Q2.8 Q3.8 R5.2 U1.41 U1.46 U3.3 U3.14 | length 4442.6
  Top Layer w10: 5280,2810 5280,2480 5270,2470 5270,2170 5324.09,2115.91 5354.09,2115.91 5425.46,2044.54 5425.46,1977.41 5452.87,1950 v1(5550,1950) ; C16.1@5610,2965.43 5625.91,2949.53 U3.3 ; U3.14 5835.39,2950 5880,2950 5880,2970 ; v1(5900,2920) v1@5900,2930 ; U1.46@6180,2870.35 U1.46 ; U1.41 6278.82,2974.5 6285,2980.68 6285,3057.8
  Top Layer w12: U1.46@6180,2870.35 6180,2912.53
  Top Layer w20: 5255,3330 C7.2 ; 5535.43,2955.43 C16.1@5620,2955.43 ; C16.1@5610,2965.43 5610,3030 5664.09,3084.09 5845.91,3084.09 5880,3050 5880,2950 v1@5900,2930 ; v1(6147.74,2934.33) 6158.2,2934.33 6180,2912.53 ; Q3.8@6560,3174.49 6545,3189.49 6620,3264.49 Q3.8
  Top Layer w40: Q2.8 Q2.8@6030.43,3314.49
  Top Layer w50: Q2.8@6030.43,3314.49 6033.52,3314.49 6254.09,3093.91 6308.91,3039.09 6381.09,3039.09 6381.99,3040 6435,3040 6479.09,2995.91 6479.09,2910.91 v1(6480,2910)
  Top Layer w60: D2.1@5470,2666.1 5470,2830 v1(5539.13,2760.87)
  Bottom Layer w40: C21.2@6480,2854.02 C21.2
  Bottom Layer w50: C28.2@5562.99,2737.01 C28.2 ; C25.2@5570,2415 C28.2 ; C27.2@5570,2680 C28.2 ; v1(6147.74,2934.33) 6147.74,2912.26 6215.98,2844.02 C19.2 C21.2 ; C21.2@6480,2854.02 v1(6480,2910)
  Bottom Layer w60: v1(5539.13,2760.87) C28.2@5562.99,2737.01
  other v1: 5770,3460 6320,3460
pads on no net: U1.16 U1.18 U1.19 U2.13 U2.A10 U2.A11 U2.AGND U2.AREF U2.PGM U2.VBAT U2.VIN U2.VUSB U3.2 U3.4 U3.5 U3.11 U3.13 U3.15 U5.4 U6.4

## Polygon pours and split planes (outlines as drawn)
GND on Top Layer "GND_L01_P000" (solid, remove dead copper, pour order 0): 5170,4000 5250,4080 6720,4080 6870,3930 6870,1680 6870,1650 6835,1615 5205,1615 5170,1650
GND on Bottom Layer "GND_L02_P002" (solid, remove dead copper, pour order 2): 5150,4015 5245,4110 6740,4110 6900,3950 6900,1680 6835,1615 5205,1615 5150,1670

## Keep-outs
Top Layer:
  lines w7.87: 6085,2830 6085,2872.9 6054.41,2903.49 6054.41,2997.87 6083.03,3026.5 6085,3026.5
Bottom Layer:
  lines w10: 6020,2990 6020,2860 6100,2780 6100,2610 6250,2460 6340,2460
Keep-Out Layer:
  lines w7.87: 5150,1430 5150,3960 5150,4015 5245,4110 6740,4110 6900,3950 6900,1640 6900,1430 6850,1380 6690,1380 6620,1450 6620,1525 6580,1565 5475,1565 5430,1520 5430,1450 5360,1380 5200,1380 5150,1430

## Other copper
Top Layer:
  rectangle net SC: 6389.49,3630 6690,3800
  rectangle net SB: 5839.49,3630 6140,3800
  region net VDD: 6190,2910 6180,2900 6180,2880
  pour cut-out: 6288.5,2574.69 6303.77,2574.69 6310,2568.46 6310,2560 6290,2560
  region net NetR12_1: 6390,3840 6690,3840 6690,4010 ccw(c6630,4010) 6630,4070 6450,4070 ccw(c6450,4010) 6390,4010
  region net NetR11_1: 5840,3840 6140,3840 6140,4010 ccw(c6080,4010) 6080,4070 5900,4070 ccw(c5900,4010) 5840,4010
  region net VDD: 5300,2800 5480,2800 ccw(c5478.57,2865.91) 5544.48,2864.48 cw(c5991.09,2854.79) 5656.82,3151.13 cw(c5697.11,3117.78) 5700,3170 6780,3170 6780,3460 5310,3460 ccw(c5310,3395) 5245,3395 5245,2855 ccw(c5300,2855)
  region net SA: 5290,3630 5590,3630 5590,4010 ccw(c5530,4010) 5530,4070 5350,4070 ccw(c5350,4010) 5290,4010
Bottom Layer:
  rectangle net SC: 6360,3330 6780,3800
  rectangle net SA: 5260,3335 5675,3800
  rectangle net SB: 5810,3330 6230,3800
  region net GND: 6690,3010 6690,3250 ccw(c6630,3250) 6630,3310 5290,3310 ccw(c5289.99,3220.01) 5200,3220 5200,2770 ccw(c5260,2770) 5260,2710 5450,2710 ccw(c5450,2760) 5500,2760 5500,2820 cw(c5781.53,2816.51) 5590,3022.88 5590,3200 5840,3200 5840,3010 6140,3010 6140,3200 6390,3200 6390,3010

## Silkscreen, mask and mechanical layers (free items; w line width, h text height)
Bottom Overlay:
  text "ESC v2.1 - Raphael Chang" at 6375,1605 h30